# EAGLE board LTC6241CS8PBF_breakout (EAGLE 8.5.1)
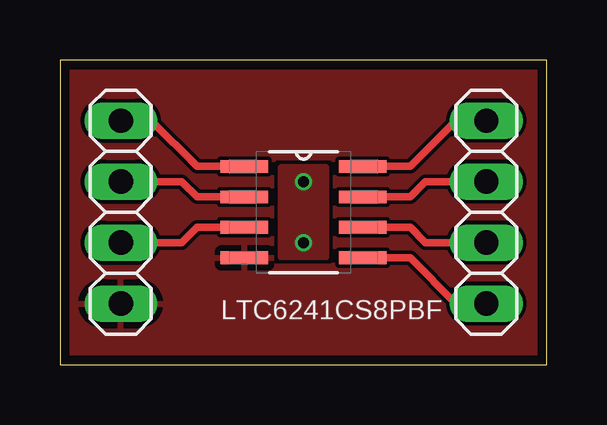
[diagram p0: board, top side]
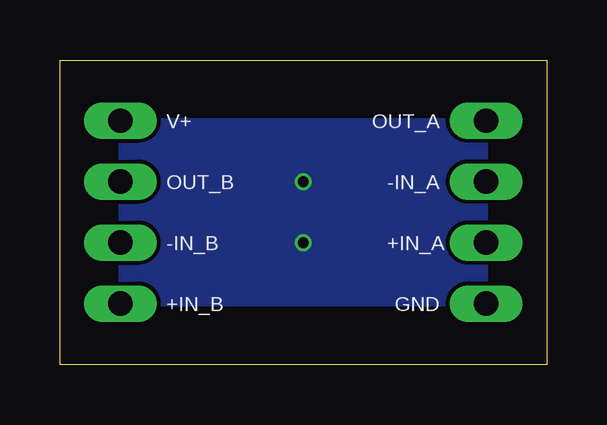
[diagram p1: board, bottom side, seen from below]

Size 20.31 x 12.69 mm. Coordinates in mm from the lower left corner, seen from the top.
Outline: 0,0 20.31,0 20.31,12.69 0,12.69 0,0
Copper layers (1*16): Top 0.035559375mm / dielectric 1.6mm / Bottom 0.035559375mm
Design rules "oshpark-2layer": minimum track width 6mil, minimum drill 10mil, track to track 6mil, track to pad 6mil, pad to pad 6mil, via to via 6mil, smd to smd 6mil, copper to edge 15mil, drill to drill 6mil, minimum pad ring 5mil, minimum via ring 5mil, stop-mask expansion 2.5mil, vias tented up to drill 0mil, thermal gap 10mil

## Footprints (pad centres in the part's own frame; a part is rotated, then mirrored left to right if it is on the bottom)
1X04 = drill 1.016 long: 1 -3.81,0; 2 -1.27,0; 3 1.27,0; 4 3.81,0
SOIC127P600X175-8N = smd 1.981 x 0.533: 1 -2.464,1.905; 2 -2.464,0.635; 3 -2.464,-0.635; 4 -2.464,-1.905; 5 2.464,-1.905; 6 2.464,-0.635; 7 2.464,0.635; 8 2.464,1.905

## Placement (x,y rotation side)
JP1  [1X04]  2.54,6.35 270 top
JP2  [1X04]  17.78,6.35 90 top
U1  LTC6241CS8PBF  [SOIC127P600X175-8N]  10.16,6.35 0 top

## Library data of the parts
JP1 JP2 = pinhead
U1 = LTC6241CS8PBF; AVAILABILITY: Good; DESCRIPTION: LTC6241 - Dual 18MHz, Low Noise, Rail-to-Rail Output, CMOS Op Amp; MF: Linear Technology; MP: LTC6241CS8#PBF; PACKAGE: SO-8 Linear Technology; PRICE: 2.03 USD

## Nets
+IN_A: JP1.3 U1.3
+IN_B: JP2.1 U1.5
-IN_A: JP1.2 U1.2
-IN_B: JP2.2 U1.6
GND: JP1.4 U1.4
OUT_A: JP1.1 U1.1
OUT_B: JP2.3 U1.7
V+: JP2.4 U1.8

## Tracks (layer width: path | path; a pad name or v marks a point on that pad's centre or on a via)
+IN_A
  Top 0.305: U1.3 5.71,5.71 5.08,5.08 JP1.3
+IN_B
  Top 0.305: U1.5 14.61,4.45 16.51,2.54 JP2.1
-IN_A
  Top 0.305: U1.2 5.71,6.99 5.08,7.62 JP1.2
-IN_B
  Top 0.305: U1.6 14.61,5.71 15.24,5.08 JP2.2
GND
  pour Top (rank 2): 0,0 20.32,0 20.32,12.7 0,12.7
HEAT  (via drill 0.45)
  other vias: 10.16,7.62 10.16,5.08
  pour Top: 9.21,8.26 11.11,8.26 11.11,4.45 9.21,4.45
  pour Bottom (rank 2): 2.54,10.16 17.78,10.16 17.78,2.54 2.54,2.54
OUT_A
  Top 0.305: U1.1 5.71,8.26 3.81,10.16 JP1.1
OUT_B
  Top 0.305: U1.7 14.61,6.99 15.24,7.62 JP2.3
V+
  Top 0.305: U1.8 14.61,8.26 16.51,10.16 JP2.4

## Text on the board
bPlace: OUT_A | V+ | -IN_A | OUT_B | +IN_A | -IN_B | GND | +IN_B